# Altium PCB PCBen.PcbDoc
Units mm, origin at the board's own origin, x right, y up, seen from the top; angles counter-clockwise.
Board outline 175.29 x 83.64 mm, 2 copper layers (Top Layer, Bottom Layer); 21 components, 31 nets, 90 pads, 9 vias.
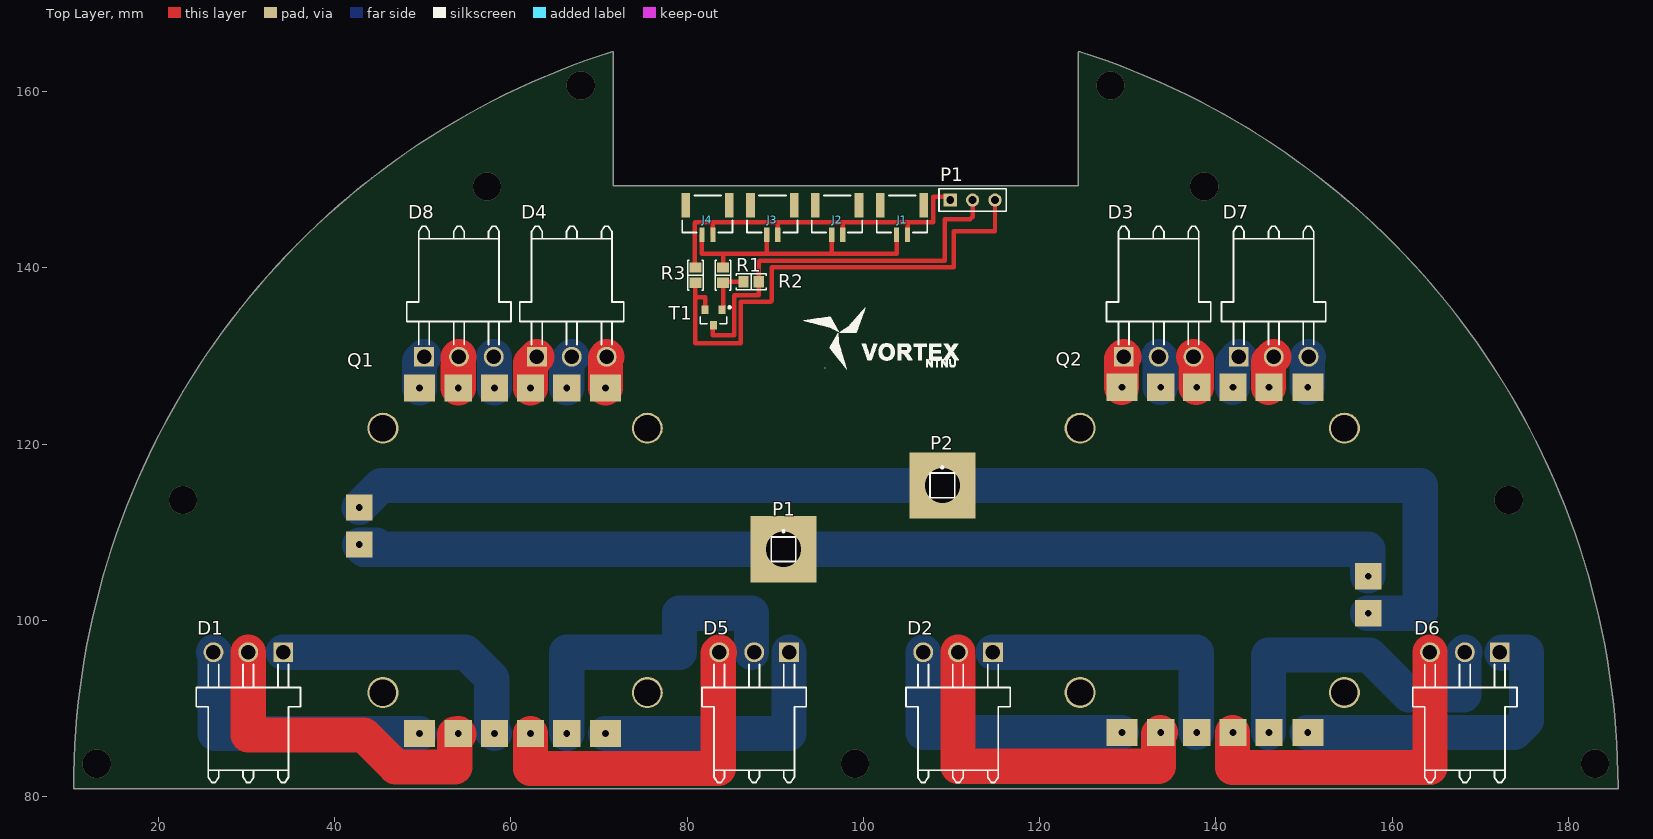
[diagram p0: Top Layer view]
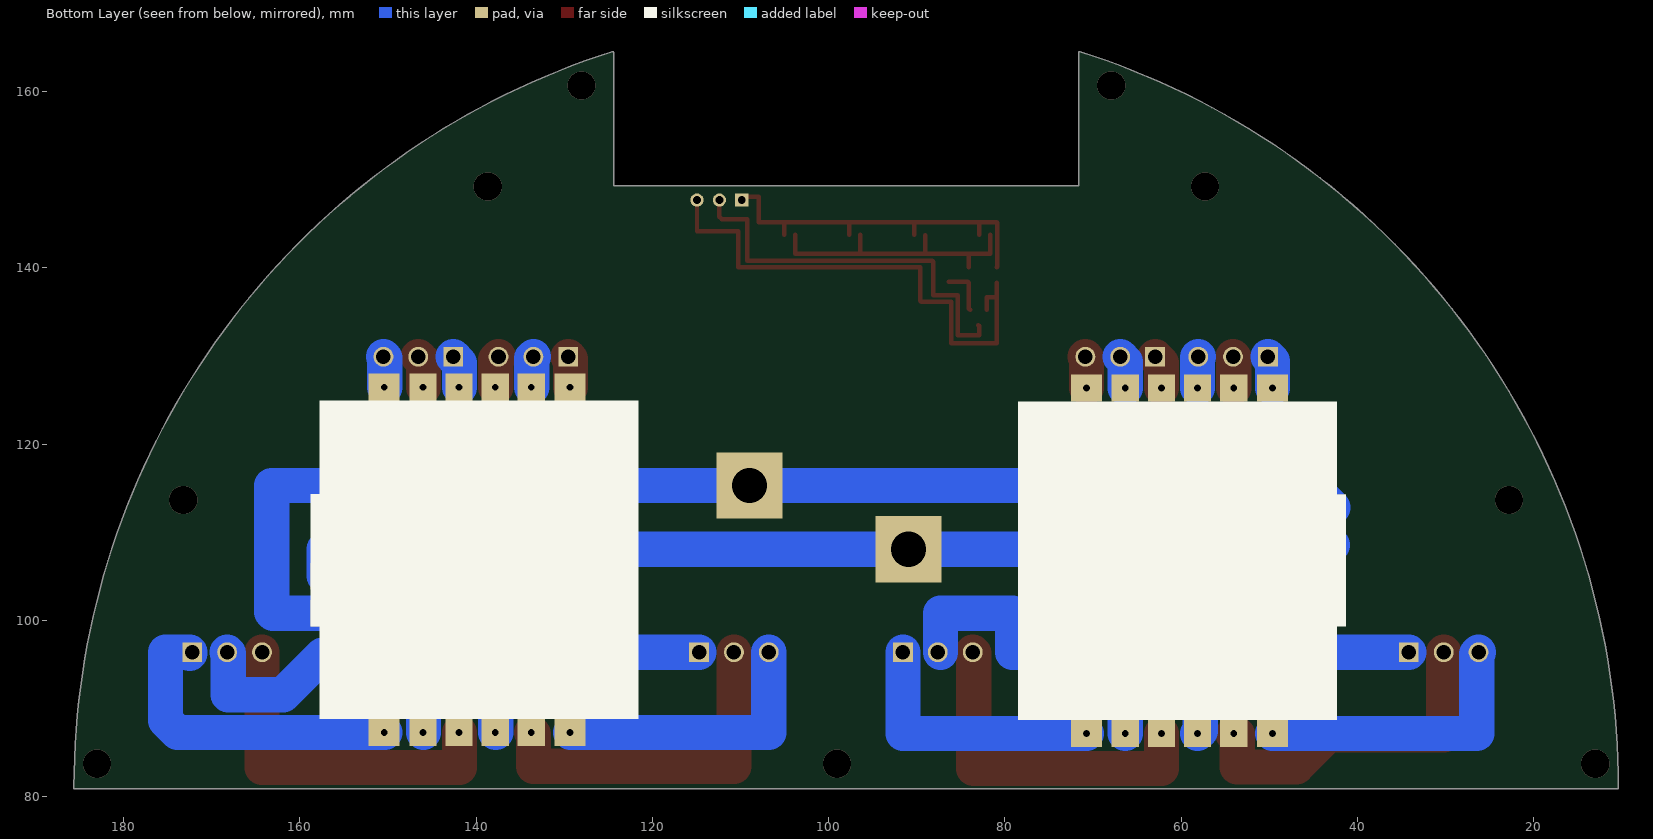
[diagram p1: Bottom Layer view, seen from below]
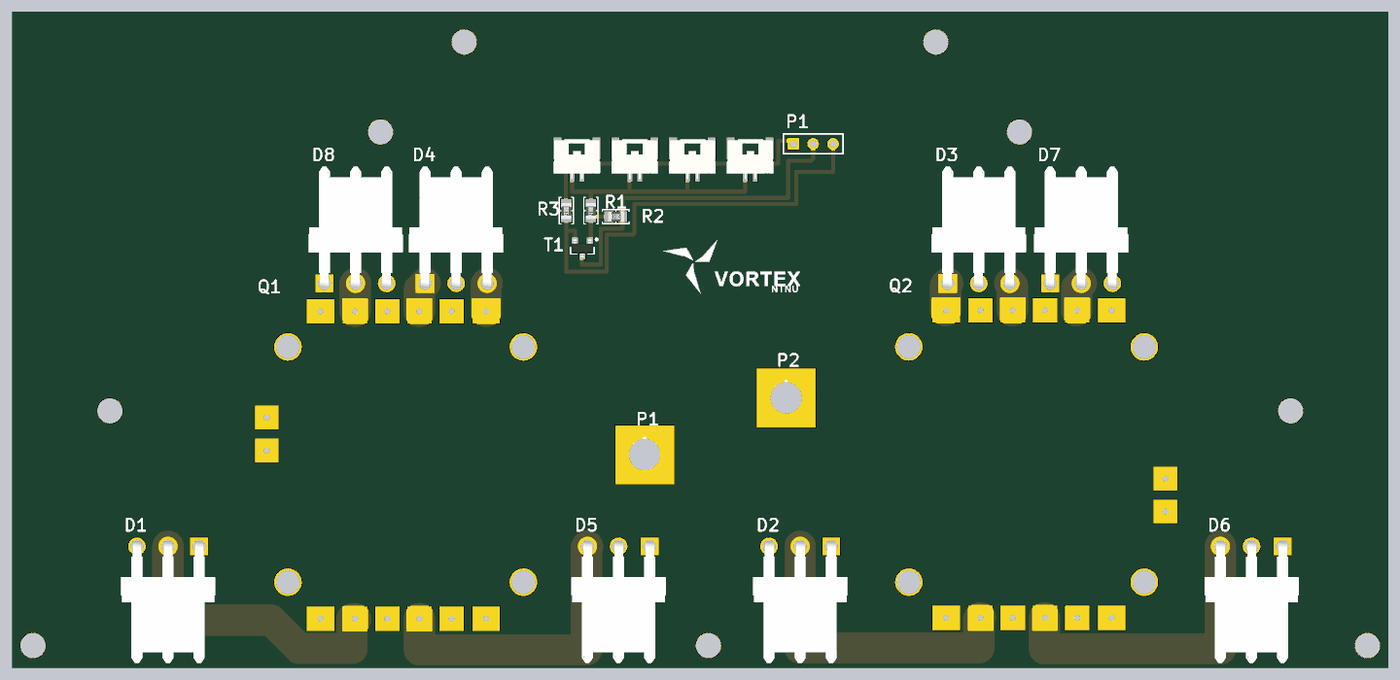
[diagram p2: 3D render of the assembled board from above, using the file's embedded part models]

## Layer stack, top to bottom
Top Solder: solder mask 0.0102, Solder Resist, Dk 3.5
Top Layer: signal copper 0.0711
Dielectric 1: dielectric 0.32, FR-4, Dk 4.8
Bottom Layer: signal copper 0.0711
Bottom Solder: solder mask 0.0102, Solder Resist, Dk 3.5

## Board outline
10.526,80.9 cw(c10.508,81.026) 10.381,81.026 cw(c98.008,81.026) 71.465,164.537 cw(c71.503,164.415) 71.627,164.446 cw(c71.508,164.4) 71.635,164.4 71.635,149.338 124.381,149.338 124.381,164.4 cw(c124.508,164.4) 124.391,164.451 cw(c124.513,164.415) 124.552,164.536 cw(c98.008,81.026) 185.635,81.115 cw(c185.544,81.026) 185.671,81.026 cw(c185.544,81.026) 185.544,80.899 10.544,80.899 cw(c10.544,81.026)

## Design rules (kind name [scope] priority, off if disabled: settings)
Clearance [All] p1: gap=0.254 ignorepadtopadclearanceinfootprint=FALSE except(0: Arc-Hole Track-Hole SMDPad-Hole THPad-Hole Via-Hole Fill-Hole Poly-Hole Region-Hole Text-Hole)
PolygonConnect [All] p1: connectstyle=Relief reliefconductorwidth=0.254 reliefentries=4 polygonreliefangle="90 Angle" airgapwidth=0.254
RoutingVias [All] p1: holewidth=0.711 width=1.27 viastyle="Through Hole" minholewidth=0.711 minwidth=1.27 maxholewidth=0.711 maxwidth=1.27
SolderMaskExpansion [All] p1: expansion=0.102
Width [All] p1: maxlimit=10 minlimit=0.254 preferedwidth=4 minimp=50.000000 maximp=50.000000 favimp=50.000000
30 further rules are at their usual default settings.

## Components (designator, comment, footprint, x,y, rotation, side; value= is the part's Value field where it differs from the comment)
D1 "" JST_B3PS-VH(LF)(SN) 34.163,96.393 r180 top
D2 "" JST_B3PS-VH(LF)(SN) 114.704,96.393 r180 top
D3 "" JST_B3PS-VH(LF)(SN) 129.54,129.921 r0 top
D4 "" JST_B3PS-VH(LF)(SN) 62.946,129.921 r0 top
D5 "" JST_B3PS-VH(LF)(SN) 91.567,96.393 r180 top
D6 "" JST_B3PS-VH(LF)(SN) 172.212,96.393 r180 top
D7 "" JST_B3PS-VH(LF)(SN) 142.598,129.921 r0 top
D8 "" JST_B3PS-VH(LF)(SN) 50.142,129.921 r0 top
J1 "BM02B-GHS-TBT(LF)(SN)(N)" "JST BM02B-GHS-TBT" 104.384,146.201 r0 top
J2 "BM02B-GHS-TBT(LF)(SN)(N)" "JST BM02B-GHS-TBT" 97.018,146.201 r0 top
J3 "BM02B-GHS-TBT(LF)(SN)(N)" "JST BM02B-GHS-TBT" 89.672,146.201 r0 top
J4 "BM02B-GHS-TBT(LF)(SN)(N)" "JST BM02B-GHS-TBT" 82.306,146.201 r0 top
P1 "Vcc" PIN1 90.932,108.077 r0 top
P1 "Header 3" HDR1X3 109.855,147.701 r0 top
P2 "Gnd" PIN1 108.966,115.316 r0 top
Q1 "ESC for Vortex" "ESC - Org" 78.48,124.815 r180 top
Q2 "ESC for Vortex" "ESC - Org" 121.587,88.821 r0 top
R1 "1K" "RES 0805/2012" 84.074,139.192 r270 top value=0.0
R2 "27K" "RES 0805/2012" 87.249,138.43 r0 top value=0.0
R3 "1K" "RES 0805/2012" 80.944,139.192 r270 top value=0.0
T1 "1" "INFINEON SOT-23-3" 82.992,134.37 r270 top

## Footprints (in the part's own frame and the unit in brackets; to place one, negate y for a bottom-side part, rotate by r counter-clockwise, add the part's x,y. Pads: shape width x height; smd on the part's side, far side on the other; paste and mask are expansions set on the pad)
"ESC - Org" [mm]
  rect 3.5x3.1 hole 0.762: 1(7.75,37.65) 6(28.85,37.65) 7(7.75,-1.55) 12(28.85,-1.55)
  rect 3.1x3.1 hole 0.762: 2(12.15,37.65) 3(16.25,37.65) 4(20.35,37.65) 5(24.45,37.65) 8(12.15,-1.55) 9(16.25,-1.55) 10(20.35,-1.55) 11(24.45,-1.55)
  rect 3x3 hole 0.762: 13(35.7,16.2) 14(35.7,12)
  round 3.508 hole 3: 15(3,33) 16(3,3) 17(33,3) 18(33,33)
  silkscreen extent 3,33 3,33
HDR1X3 [mm] "Connector; Header; 3 Position"
  rect 1.5x1.5 hole 0.9: 1(0,0)
  round 1.5 hole 0.9: 2(2.54,0) 3(5.08,0)
  silkscreen extent -1.27,-1.27 6.35,1.27
"INFINEON SOT-23-3" [mm] "SOT23, 3-Leads, Body 2.90x2.40mm, Pitch 0.95mm, IPC Medium Density"
  rect 0.972x0.802 smd: 1(-0.885,0.95) 2(0.885,0) 3(-0.885,-0.95)
  silkscreen extent -1.27,-1.5 0.7,1.95, body extent -1.16,-1.45 1.16,1.45, height 1
"JST BM02B-GHS-TBT" [mm] "JST GH Series 1.25mm pitch, 4 pin top entry connector"
  rect 0.6x1.7 smd: 1(-0.625,-2.437) 2(0.625,-2.437)
  rect 1x2.8 smd: M(-2.475,0.913) M(2.475,0.913)
  silkscreen extent -2.87,-2.19 2.85,2.01, body extent -2.88,-2.99 2.87,1.96, height 4.18
JST_B3PS-VH(LF)(SN) [mm]
  rect 2.25x2.25 hole 1.65 mask+0.102: 22(0,0)
  round 2.25 hole 1.65 mask+0.102: 23(3.96,0) 24(7.92,0)
  silkscreen extent -1.95,1.4 9.87,14.8, body extent -1.97,-0.63 9.85,14.84, height 8.57
PIN1 [mm] "Connector; Plug"
  rect 7.5x7.5 hole 4: 1(0,0)
  silkscreen extent -1.4,-1.4 1.4,2.17
"RES 0805/2012" [mm] "Chip Resistor, 2-Leads, Body 2.00x1.25mm, IPC Medium Density"
  rect 1.15x1.35 smd: 1(-0.875,0) 2(0.875,0)
  silkscreen extent -1.7,-0.9 1.7,0.9, body extent -0.95,-0.62 1.05,0.63, height 0.6

## Part data
D1 D2 D3 D4 D5 D6 D7 D8: library part Connect?
J1 J2 J3 J4: "CONN HEADER GH TOP 2POS 1.25MM", Colour=Natural, Manufacturer="JST Sales America Inc.", Supplier Part Number 1=455-1578-2-ND, ComponentLink1Description=Datasheet, ComponentLink1URL=http://www.jst-mfg.com/product/pdf/eng/eGH.pdf, ComponentLink2Description="Digi-Key Listing", ComponentLink2URL=http://www.digikey.ca/product-detail/en/BM02B-GHS-TBT(LF)(SN)(N)/455-1578-2-ND/807800, Contact Finish=Tin, Fastening Type="Locking Ramp", Number Of Positions=2, Number Of Rows=1, PartId=7816, Part Number=BM02B-GHS-TBT(LF)(SN)(N), Pitch="0.049\" (1.25mm)", Price=0,2297, Series=GH, Supplier 1=Digi-Key, Type="Surface Mount"
P1 P2: library part Plug, "Plug", LatestRevisionDate=17-Jul-2002, LatestRevisionNote="Re-released for DXP Platform.", Publisher="Altium Limited"
P1: "Header, 3-Pin", LatestRevisionDate=17-Jul-2002, LatestRevisionNote="Re-released for DXP Platform.", Publisher="Altium Limited"
Q1 Q2: library part ESC
R1 R2 R3: library part RC0805JR-070RL, "RES SMD 0.0 OHM JUMPER 1/8W 0805", Device Package="0805 (2012 Metric)", Manufacturer=Yageo, PowerRating="0.125W, 1/8W", Supplier Part Number 1=311-0.0ARTR-ND, TemperatureRange="-55C ~ 155C", Tolerance=Jumper, ComponentLink1Description=Datasheet, ComponentLink1URL=http://www.yageo.com/documents/recent/PYu-RC_Group_51_RoHS_L_04.pdf, ComponentLink2Description="Digi-Key Listing", ComponentLink2URL=https://www.digikey.com/product-detail/en/yageo/RC0805JR-070RL/311-0.0ARTR-ND/728216, PartId=16144, Part Number=RC0805JR-070RL, Price=0,0031, Supplier 1=Digi-Key
T1: library part "BSS308PE H6327", "MOSFET P-CH 30V 2A SOT23", Current Continuous Drain="2A (Ta)", Device Package="TO-236-3, SC-59, SOT-23-3", Drain to Source Voltage (Vdss)=30V, Input Capacitance (Ciss) at Vds="500pF @ 15V", Manufacturer="Infineon Technologies", Power - Max=500mW, Supplier Part Number 1="BSS308PE H6327TR-ND", ComponentLink1Description=Datasheet, ComponentLink1URL=http://www.infineon.com/dgdl/BSS308PE_Rev2.03.pdf?folderId=db3a304314dca38901154a72e3951a65&fileId=db3a304330f686060131099c80400073, ComponentLink2Description="Digi-Key Listing", ComponentLink2URL=http://www.digikey.com/product-detail/en/BSS308PE%20H6327/BSS308PE%20H6327TR-ND/2783466, Features="Logic Level Gate, 4.5V Drive", Gate Charge (Qg)="5nC @ 10V", PartId=8163, Part Number="BSS308PE H6327", Price=0,0819, Rds On (Max) at Id, Vgs="80 mOhm @ 2A, 10V", Supplier 1=Digi-Key, Type="MOSFET P-Channel, Metal Oxide", Vgs(th) (Max) at Id="1V @ 11uA"

## Via types
v1: diameter 3.2, hole 3.2, Top Layer to Bottom Layer, 9 vias

## Nets (pads, with @x,y where several pads share a name; then routed paths per layer and width w, separated by ;. In a path a pad name is that pad's centre, name@x,y a point inside that pad or via, vN(x,y) a via of type N, cw(c..) or ccw(c..) an arc to the next point about the centre after c; other vN are vias at no path point)
+5: P1.2 R2.2 T1.2 | length 45.8
  Top Layer w0.508: T1.2 82.931,133.424 82.931,132.334 85.344,132.334 85.344,136.906 88.124,136.906 R2.2 88.124,140.702 88.237,140.815 109.22,140.815 109.22,145.542 112.141,145.542 112.395,145.796 P1.2
GND: J1.2 J2.2 J3.2 J4.2 P1.1@109.855,147.701 R3.1 | length 43
  Top Layer w0.508: R3.1 80.873,140.138 80.873,145.135 80.944,145.206 82.931,145.206 ; J4.2 82.931,145.206 ; J3.2 90.297,145.161 90.252,145.206 ; J2.2 97.663,143.784 97.663,145.206 ; J1.2 105.009,145.028 104.831,145.206 ; P1.1@109.855,147.701 109.474,148.082 107.95,148.082 107.95,145.206 104.831,145.206 ; 82.931,145.206 90.252,145.206 ; 90.252,145.206 97.663,145.206 ; 97.663,145.206 104.831,145.206
NetD1_22: D1.22 Q1.4 | length 31.3
  Bottom Layer w4: D1.22 54.83,96.393 57.834,93.389 57.834,87.461 Q1.4
NetD1_23: D1.23 Q1.5 | length 38.6
  Top Layer w4: D1.23 30.203,86.995 43.312,86.995 46.946,83.361 53.634,83.361 53.634,87.093 54.102,87.093 Q1.5
NetD1_24: D1.24 Q1.6 | length 32.5
  Bottom Layer w4: D1.24 26.454,96.182 26.454,87.165 Q1.6
NetD2_22: D2.22 Q2.9 | length 32.2
  Bottom Layer w4: D2.22 137.776,96.393 Q2.9@137.776,87.271
NetD2_23: D2.23 Q2.8 | length 39.6
  Top Layer w4: D2.23 110.744,83.439 133.5,83.439 133.5,87.095 Q2.8@133.676,87.271
NetD2_24: D2.24 Q2.7 | length 31.6
  Bottom Layer w4: D2.24 106.784,87.294 106.807,87.271 Q2.7@129.276,87.271
NetD3_22: D3.22 Q2.1 | length 3.6
  Top Layer w4: Q2.1@129.276,126.471 129.276,129.657 D3.22
NetD3_23: D3.23 Q2.2 | length 3.5
  Bottom Layer w4: D3.23 133.676,129.745 Q2.2@133.676,126.471
NetD3_24: D3.24 Q2.3 | length 3.6
  Top Layer w4: D3.24 137.776,129.605 Q2.3@137.776,126.471
NetD4_22: D4.22 Q1.9 | length 3.9
  Top Layer w4: Q1.9 62.23,129.205 D4.22
NetD4_23: D4.23 Q1.8 | length 3.8
  Bottom Layer w4: Q1.8 66.33,129.345 D4.23
NetD4_24: D4.24 Q1.7 | length 3.6
  Top Layer w4: Q1.7 70.73,129.785 D4.24
NetD5_22: D5.22 Q1.1 | length 30
  Bottom Layer w4: Q1.1 91.524,87.165 91.567,87.208 D5.22
NetD5_23: D5.23 Q1.2 | length 39.1
  Bottom Layer w4: Q1.2 66.33,96.393 79.121,96.393 79.121,100.821 87.313,100.821 D5.23@87.313,96.393
NetD5_24: D5.24 Q1.3 | length 38.5
  Top Layer w4: Q1.3 62.23,83.185 83.52,83.185 83.52,96.266 D5.24
NetD6_22: D6.22 Q2.12 | length 36.1
  Bottom Layer w4: Q2.12@150.376,87.271 173.885,87.271 175.26,88.646 175.26,96.393 172.506,96.393 D6.22@172.506,96.266
NetD6_23: D6.23 Q2.11 | length 37.7
  Bottom Layer w4: Q2.11@145.976,87.271 145.976,96.065 157.406,96.065 161.904,91.567 168.125,91.567 168.125,96.266 D6.23
NetD6_24: D6.24 Q2.10 | length 39.5
  Top Layer w4: Q2.10@141.876,87.271 141.876,83.312 164.292,83.312 D6.24
NetD7_22: D7.22 Q2.4 | length 3.7
  Bottom Layer w4: Q2.4@141.876,126.471 141.876,129.199 D7.22
NetD7_23: D7.23 Q2.5 | length 3.7
  Top Layer w4: Q2.5@145.976,126.471 145.977,126.472 145.977,129.34 D7.23
NetD7_24: D7.24 Q2.6 | length 3.5
  Bottom Layer w4: Q2.6@150.376,126.471 150.376,129.779 D7.24
NetD8_22: D8.22 Q1.12 | length 3.8
  Bottom Layer w4: Q1.12 49.63,129.409 D8.22
NetD8_23: D8.23 Q1.11 | length 3.6
  Top Layer w4: Q1.11 54.03,129.849 D8.23
NetD8_24: D8.24 Q1.10 | length 3.6
  Bottom Layer w4: D8.24 58.13,129.853 Q1.10
NetJ1_1: J1.1 J2.1 J3.1 J4.1 R1.1 | length 32.3
  Top Layer w0.254: J3.1@89.007,143.724 J3.1
  Top Layer w0.508: J4.1 81.681,141.625 84.201,141.625 ; R1.1 84.074,141.498 84.201,141.625 ; J3.1@89.007,143.724 89.007,141.625 ; J2.1 96.393,141.625 ; J1.1 103.759,141.625 96.393,141.625 ; 84.201,141.625 89.007,141.625 ; 89.007,141.625 96.393,141.625
NetP1_1: P1.1@90.932,108.077 Q1.13 Q2.13 | length 119.5
  Bottom Layer w4: 44.714,108.561 42.834,108.561 43.318,108.077 90.932,108.077 157.226,108.077 Q2.13@157.226,105.075
NetP1_3: P1.3 R3.2 T1.3 | length 59.5
  Top Layer w0.508: R3.2 80.944,136.652 ; T1.3 82.042,136.652 80.944,136.652 ; P1.3 114.935,144.145 110.236,144.145 110.236,140.053 89.597,140.053 89.597,136.271 89.47,136.144 86.106,136.144 86.106,131.445 80.944,131.445 80.944,136.652
NetP2_1: P2.1 Q1.14 Q2.14 | length 141.8
  Bottom Layer w4: Q1.14 45.281,115.316 P2.1 163.195,115.316 163.195,100.965 163.051,100.821 Q2.14@157.226,100.821
NetR1_2: R1.2 R2.1 T1.1 | length 5.5
  Top Layer w0.508: T1.1 84.074,135.387 R1.2 84.187,138.43 R2.1
pads on no net: J1.M J2.M J3.M J4.M Q1.15 Q1.16 Q1.17 Q1.18 Q2.15 Q2.16 Q2.17 Q2.18
copper on no net:
  other v1: 13,83.728 99.06,83.728 183.024,83.728 22.8,113.665 173.228,113.665 57.277,149.225 138.684,149.225 67.937,160.694 128.024,160.694

## Silkscreen, mask and mechanical layers (free items; w line width, h text height)
Top Overlay:
  drawing of 1208 lines, arcs and shapes, not listed
Drill Drawing:
  lines w0.254: 10.508,81.026 cw(c98.008,81.026) 71.503,164.415 ; 10.544,81.026 185.544,81.026 ; 71.508,164.4 71.508,149.211 124.508,149.211 124.508,164.4 ; 124.513,164.415 cw(c98.008,81.026) 185.508,81.026